# Altium PCB PV_PCB.PcbDoc (part 1 of 2)
Units mil, origin at the board's own origin, x right, y up, seen from the top; angles counter-clockwise.
Board outline 6100 x 4165 mil, 2 copper layers (Top Layer, Bottom Layer), stack 12.8 mil thick; 137 components, 94 nets, 414 pads, 55 vias.
Unrouted connection lines stored in the file: 34.
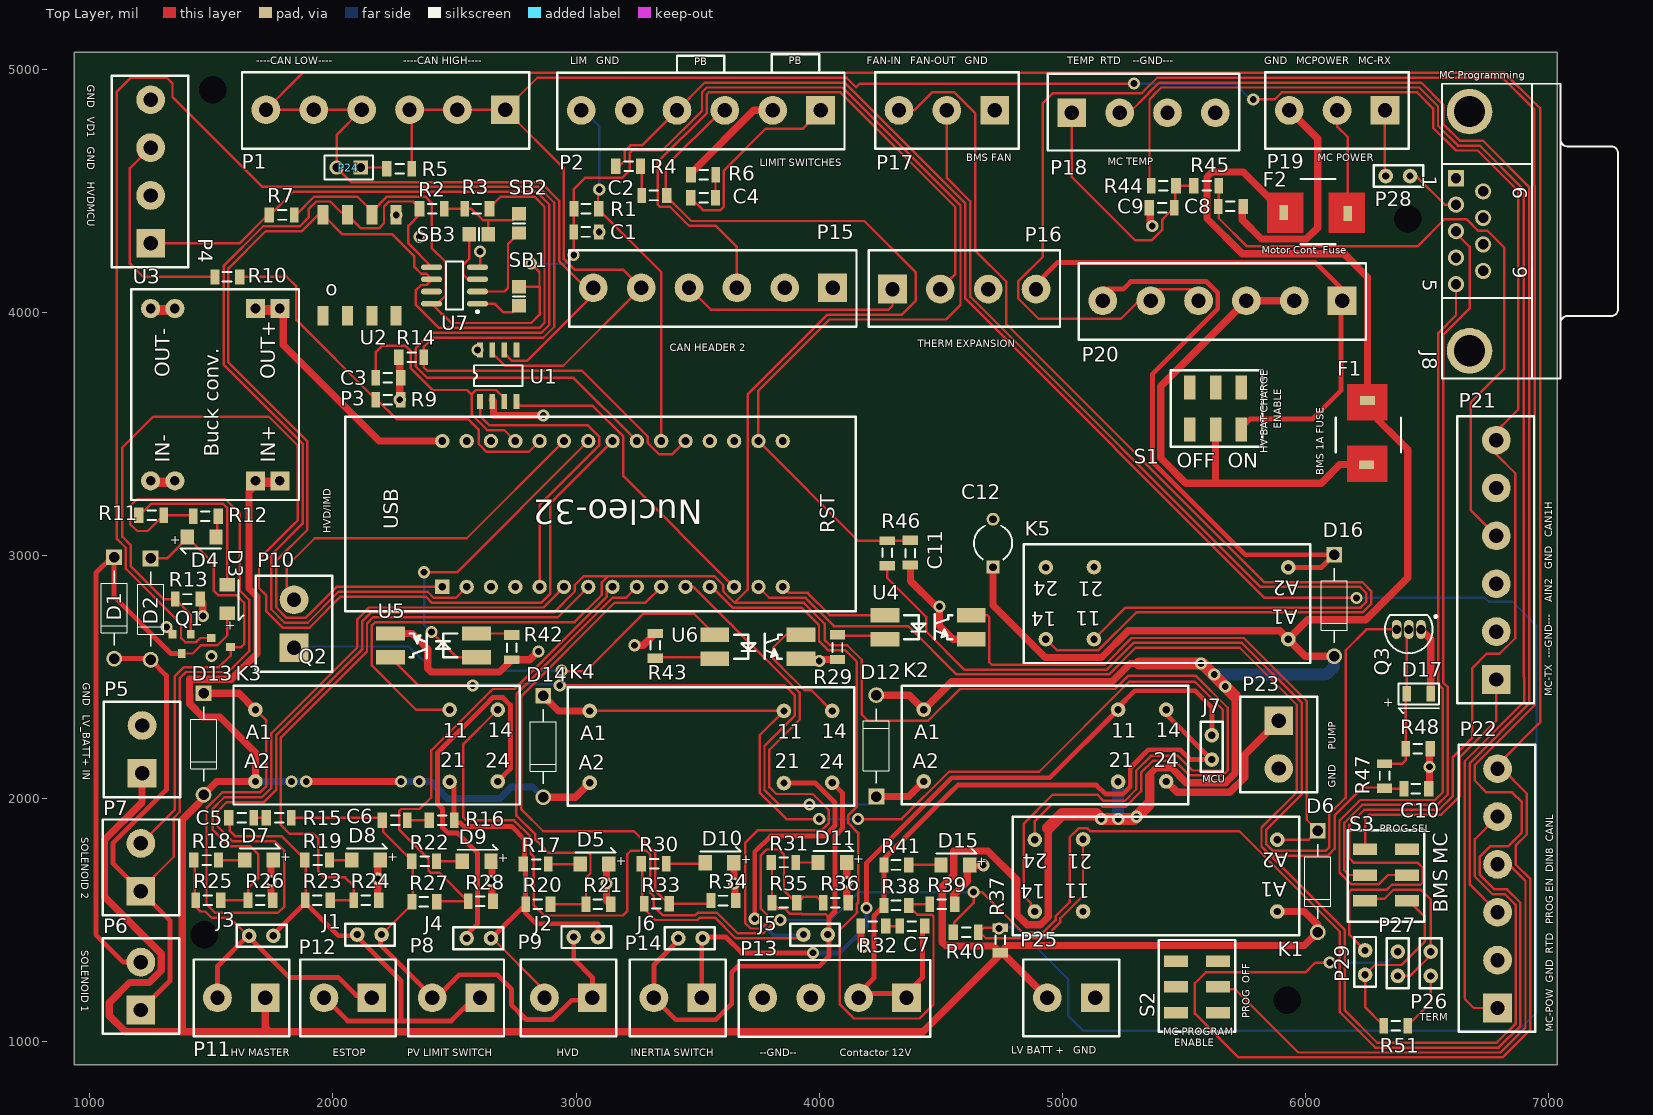
[diagram p0: Top Layer view]
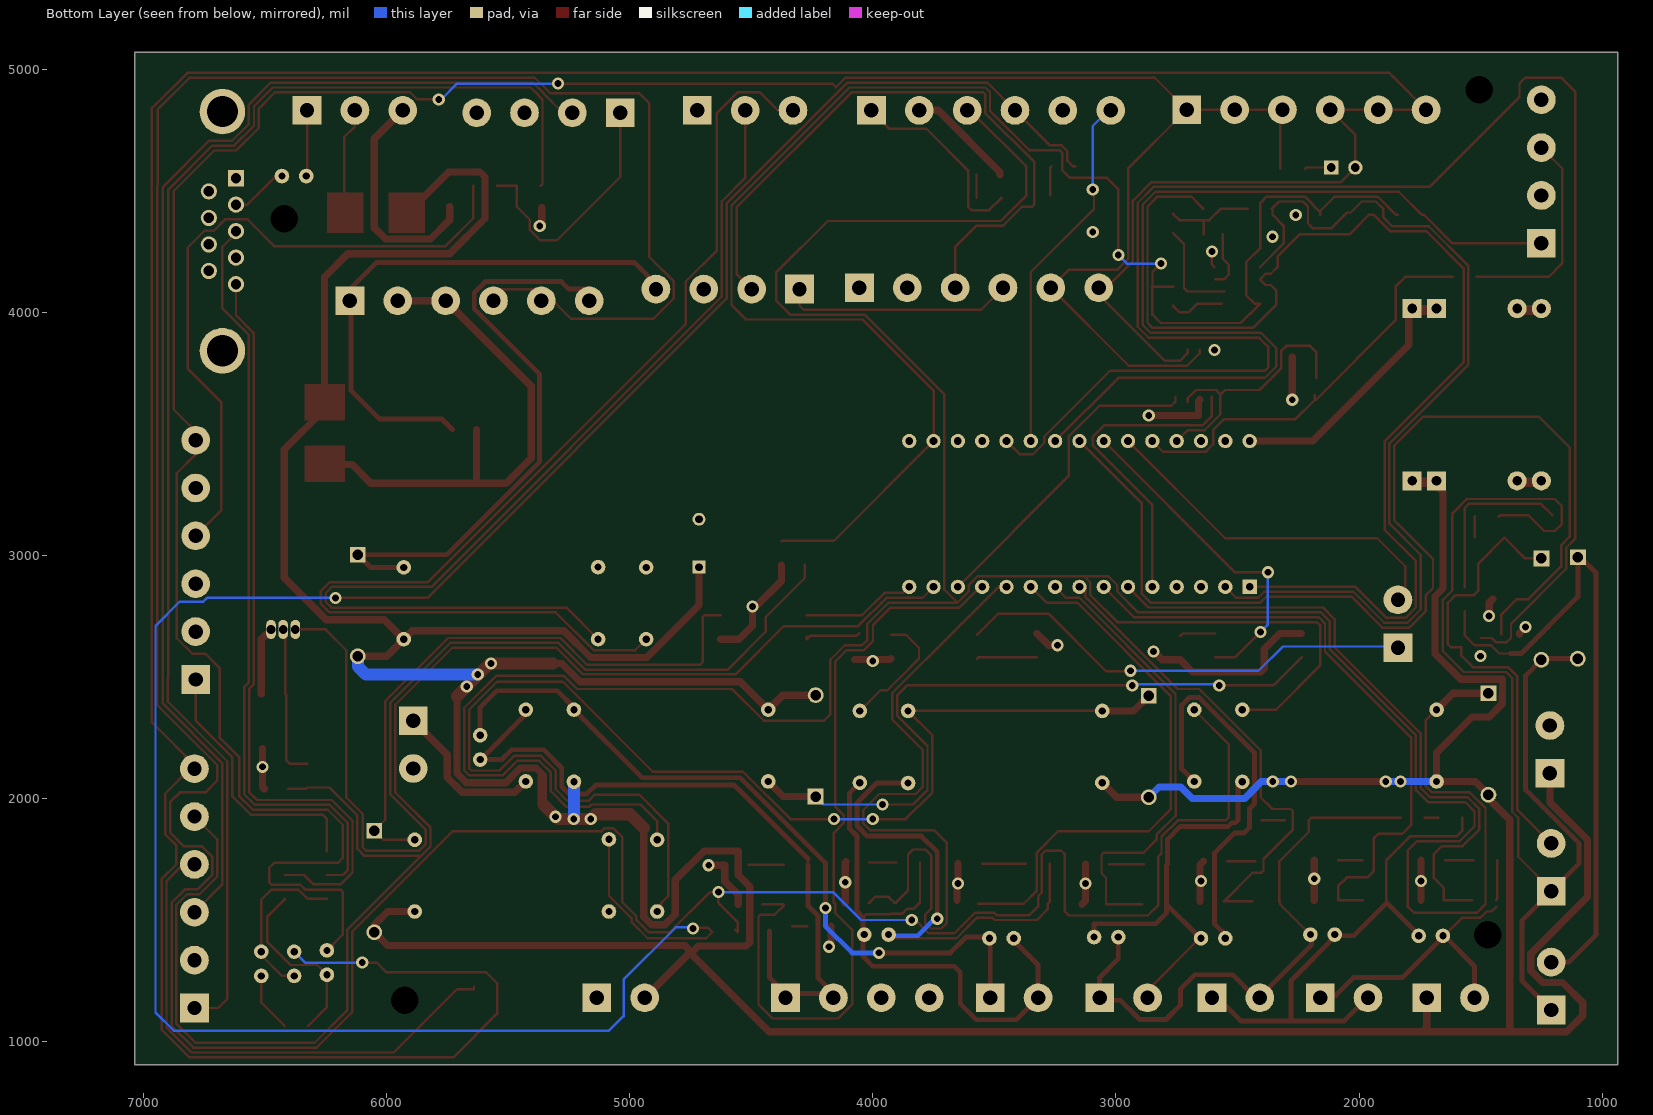
[diagram p1: Bottom Layer view, seen from below]
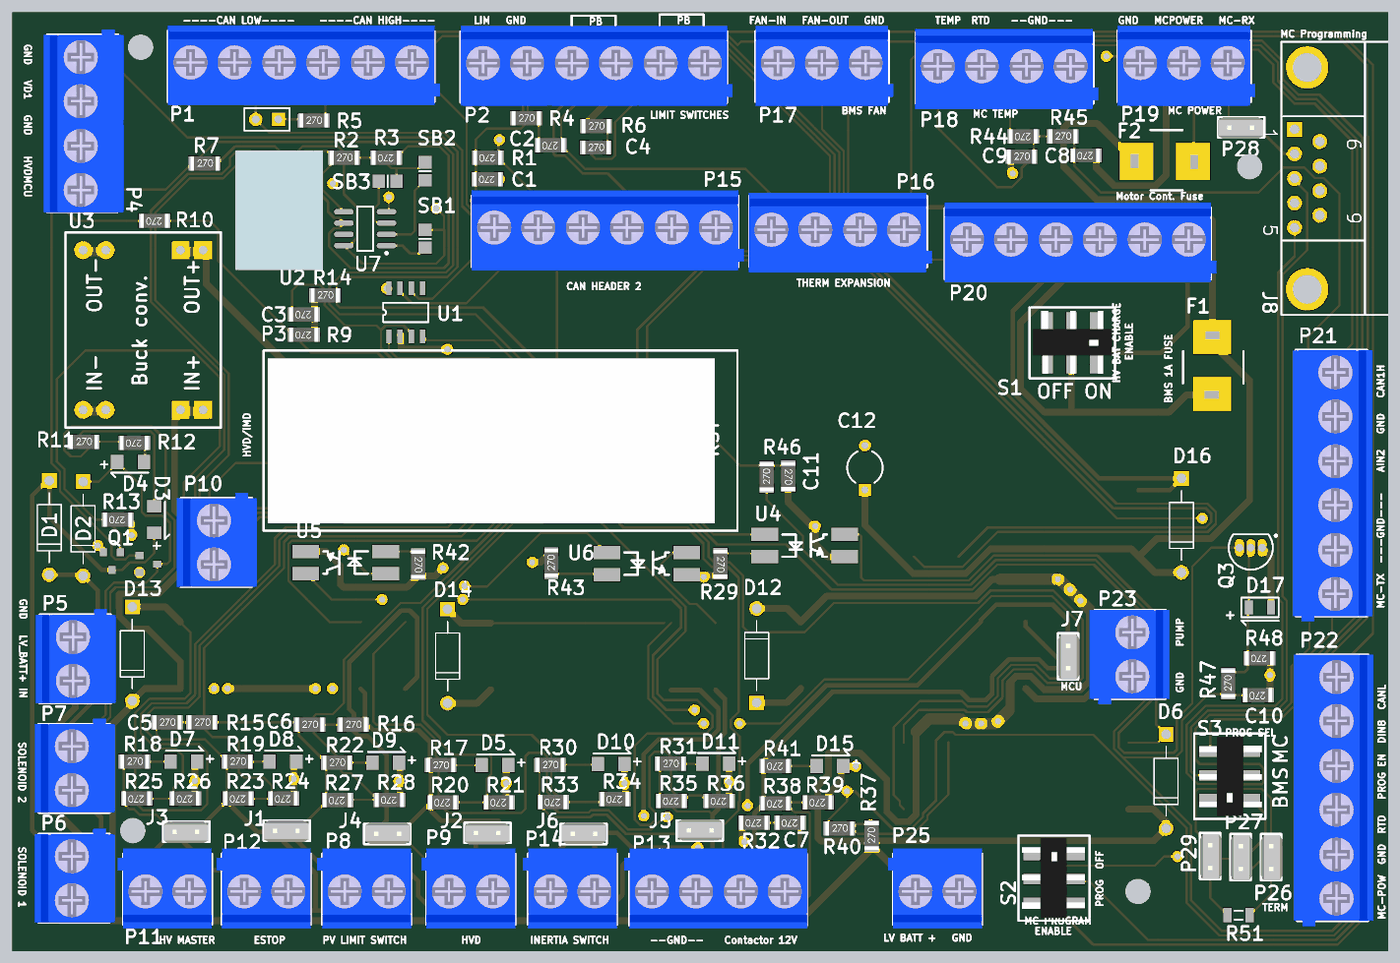
[diagram p3: 3D render of the assembled board from above, using the file's embedded part models]

## Layer stack, top to bottom
Top Solder: solder mask 0.4, Solder Resist, Dk 3.5
Top Layer: signal copper 1.4
Dielectric 1: core 10, FR-4, Dk 4.2
Bottom Layer: signal copper 1.4
Bottom Solder: solder mask 0.4, Solder Resist, Dk 3.5

## Board outline
935,905 7035,905 7035,5070 935,5070

## Design rules (kind name [scope] priority, off if disabled: settings)
Clearance [All] p1: gap=10 ignorepadtopadclearanceinfootprint=FALSE except(0: Arc-Hole Track-Hole SMDPad-Hole THPad-Hole Via-Hole Fill-Hole Poly-Hole Region-Hole Text-Hole)
PolygonConnect [All] p1: connectstyle=Relief reliefconductorwidth=10 reliefentries=4 polygonreliefangle="90 Angle" airgapwidth=10
RoomDefinition PV_MCU_IO [InComponentClass('PV_MCU_IO')] p1: confinementstyle=ConfineIn formatcopy=TRUE lockcomponents=FALSE outline 915,881.89 7050,881.89 7050,5040 915,5040
RoomDefinition PV_BMS_IO [InComponentClass('PV_BMS_IO')] p2: confinementstyle=ConfineIn formatcopy=TRUE lockcomponents=FALSE outline 930,995 7335,995 7335,5070 930,5070
RoomDefinition PV_Shutdown [InComponentClass('PV_Shutdown')] p3: confinementstyle=ConfineIn formatcopy=TRUE lockcomponents=FALSE outline 980,950 6455,950 6455,3160 980,3160
RoutingVias [All] p1: holewidth=28 width=50 viastyle="Through Hole" minholewidth=28 minwidth=50 maxholewidth=28 maxwidth=50
SolderMaskExpansion [All] p1: expansion=4
Width [All] p1: maxlimit=50 minlimit=10 preferedwidth=10 minimp=50.000000 maximp=50.000000 favimp=50.000000
30 further rules are at their usual default settings.

## Classes and differential pairs
component class PV_Shutdown: C5 C6 C7 D5 D6 D7 D8 D9 D10 D11 D12 D13 D14 D15 J1 J2 J3 J4 J5 J6 J7 K1 K2 K3 K4 P8 P9 P10 P11 P12 P13 P14 P23 R15 R16 R17 R18 R19 R20 R21 R22 R23 R24 R25 R26 R27 R28 R29 R30 R31 R32 R33 R34 R35 R36 R37 R38 R39 R40 R41 R42 R43 U4 U5 U6
component class PV_MCU_IO: C1 C2 C3 C4 C11 C12 D1 D2 D3 D4 P1 P2 P3 P4 P5 P6 P7 P24 P25 Q1 Q2 R1 R2 R3 R4 R5 R6 R7 R9 R10 R11 R12 R13 R14 SB1 SB2 SB3 U1 U2 U3
component class PV_BMS_IO: C8 C9 C10 D16 D17 F1 F2 J8 K5 P15 P16 P17 P18 P19 P20 P21 P22 P26 P27 P28 P29 Q3 R44 R45 R46 R47 R48 R51 S1 S2 S3

## Components (designator, comment, footprint, x,y, rotation, side; value= is the part's Value field where it differs from the comment)
C1 "Cap" 1206#1 3088.43,4330 r180 top value=100pF
C2 "Cap" 1206#1 3368.43,4480 r180 top value=100nF
C3 "Cap" 1206#1 2275,3730 r180 top value=1uF
C4 "Cap" 1206#1 3475,4470 r0 top value=100nF
C5 "Cap" 1206#1 1575,1920 r0 top value=100nF
C6 "Cap" 1206#1 2206.57,1910 r0 top value=100nF
C7 "Cap" 1206#1 4430,1475 r180 top value=100nF
C8 "Cap" 1206#1 5740,4435 r180 top value=1000pF
C9 "Cap" 1206#1 5361.57,4430 r0 top value=4700pF
C10 "Cap" 1206#1 6503.43,2040 r180 top value=100pF
C11 "Cap" 1206#1 4375,3058.43 r270 top value=100pF
C12 "Cap" CAPR5-4X5 4715,3050 r90 top value=220uF
D1 "Flyback" 1N4007 1097.13,2989.86 r270 top
D2 "Flyback" 1N4007 1247.13,2984.86 r270 top
D3 "LED1" "1206 LED" 1565,2820 r270 top
D4 "LED2" "1206 LED" 1460,3075 r180 top
D5 "LED1" "1206 LED" 3075.79,1730 r0 top
D6 "Diode" 1N4007 6047.13,1864.86 r270 top
D7 "LED1" "1206 LED" 1695.79,1746.57 r0 top
D8 "LED1" "1206 LED" 2135.79,1746.57 r0 top
D9 "LED1" "1206 LED" 2590.79,1741.57 r0 top
D10 "LED1" "1206 LED" 3590,1735 r0 top
D11 "LED1" "1206 LED" 4054.06,1736.57 r0 top
D12 "Diode" 1N4007 4237.87,2010.14 r90 top
D13 "Diode" 1N4007 1465,2430 r270 top
D14 "Diode" 1N4007 2862.13,2419.86 r270 top
D15 "LED1" "1206 LED" 4560,1726.57 r0 top
D16 "Diode" 1N4007 6115,3000 r270 top
D17 "Diode" "1206 DIODE" 6465.79,2430 r180 top
F1 "3A Fuse" "1A FUSE HOLDER" 6337.68,3302.24 r90 top
F2 "Fuse 3A" "1A FUSE HOLDER" 6244.65,4492.68 r180 top
J1 "S1011EC-02-ND" "2 Pin Jumper" 2100,1440 r0 top
J2 "S1011EC-02-ND" "2 Pin Jumper" 2990,1430 r0 top
J3 "S1011EC-02-ND" "2 Pin Jumper" 1655,1435 r0 top
J4 "S1011EC-02-ND" "2 Pin Jumper" 2650,1425 r180 top
J5 "S1011EC-02-ND" "2 Pin Jumper" 4035,1440 r180 top
J6 "S1011EC-02-ND" "2 Pin Jumper" 3520,1425 r180 top
J7 "S1011EC-02-ND" "2 Pin Jumper" 5615,2160 r90 top
J8 "D Connector 9" DSUB1.385-2H9 7049.02,4333.07 r270 top
K1 "RT444012F-ND" RT444012F 4883,-5255 r90 top
K2 "RT444012F-ND" RT444012F 5431,9155.28 r270 top
K3 "RT444012F-ND" RT444012F 2682,9155 r270 top
K4 "RT444012F-ND" RT444012F 4057,9150 r270 top
K5 "RT444012F-ND" RT444012F 4928,-4135 r90 top
P1 "CAN" "6POS TERM BLOCK" 2708.7,4832.52 r180 top
P2 "Header 6" "6POS TERM BLOCK" 4005.55,4830 r180 top
P3 "NUCLEO-L432KC" NUCLEO-32 2450,2870 r90 top
P4 "Header 4" "4POS TERM BLOCK" 1250,4283.15 r90 top
P5 "Battery Input" "2POS TERM BLOCK" 1215,2103.15 r90 top
P6 "Solenoid 8" "2POS TERM BLOCK" 1210,1130 r90 top
P7 "Solenoid 8" "2POS TERM BLOCK" 1210,1618.15 r90 top
P8 "PV Limit Switch" "2POS TERM BLOCK" 2605,1180 r180 top
P9 "HVD Interlock" "2POS TERM BLOCK" 3066.85,1180 r180 top
P10 "Battery Input" "2POS TERM BLOCK" 1840,2620 r90 top
P11 "HVMaster" "2POS TERM BLOCK" 1721.85,1180 r180 top
P12 "EStop1" "2POS TERM BLOCK" 2160,1180 r180 top
P13 "277-5738-ND" "4POS TERM BLOCK" 4358.7,1180.67 r180 top
P14 "Inertia Switch-NC" "2POS TERM BLOCK" 3516.85,1180 r180 top
P15 "Header 6" "6POS TERM BLOCK" 4055,4100.04 r180 top
P16 "Header 4" "4POS TERM BLOCK" 4301.3,4095 r0 top
P17 "Header 3" "3POS TERM BLOCK" 4721.85,4830 r180 top
P18 "Header 4" "4POS TERM BLOCK" 5038.78,4820 r0 top
P19 "Header 3" "3POS TERM BLOCK" 6326.85,4830 r180 top
P20 "Header 6" "6POS TERM BLOCK" 6150.55,4046.85 r180 top
P21 "Header 6" "6POS TERM BLOCK" 6785,2489.45 r90 top
P22 "Header 6" "6POS TERM BLOCK" 6790,1138.15 r90 top
P23 "Pump Power Switch" "2POS TERM BLOCK" 5890,2320 r270 top
P24 "TERM" HDR1X2 2115,4595 r180 top
P25 "Battery Input" "2POS TERM BLOCK" 5135,1180 r180 top
P26 "TERM" "2 Pin Jumper" 6515,1270 r90 top
P27 "TERM" "2 Pin Jumper" 6380,1270 r90 top
P28 "Program Enable" "2 Pin Jumper" 6330,4560 r0 top
P29 "Program Enable" "2 Pin Jumper" 6245,1275 r90 top
Q1 "MOSFET-N" SOT-23-3 1377.4,2596.26 r180 top
Q2 "MOSFET-N" SOT-23-3 1578.74,2622.6 r270 top
Q3 "2N3904" TO-92A 6425,2695 r90 top
R1 "Res1" 1206#1 3090,4425 r180 top value=1K
R2 "Res1" 1206#1 2360,4425 r0 top value=120
R3 "Res1" 1206#1 2640,4425 r180 top value=120
R4 "Res1" 1206#1 3166.57,4600 r0 top value=1K
R5 "Res1" 1206#1 2225,4590 r0 top value=120
R6 "Res1" 1206#1 3476.57,4565 r0 top value=1K
R7 "Res1" 1206#1 1741.57,4400 r0 top value=1K
R9 "Res1" 1206#1 2275,3640 r180 top value=2.2K
R10 "Res1" 1206#1 1613.43,4145 r180 top value=1K
R11 "Res1" 1206#1 1205,3165 r0 top value=1K
R12 "Res1" 1206#1 1523.43,3160 r180 top value=1K
R13 "Res1" 1206#1 1450,2820 r180 top value=10K
R14 "Res1" 1206#1 2275,3815 r0 top value=10K
R15 "Res1" 1206#1 1730,1920 r0 top value=1K
R16 "Res1" 1206#1 2400,1910 r0 top value=1K
R17 "Res1" 1206#1 2787.36,1730 r0 top value=1K
R18 "Res1" 1206#1 1430.79,1746.57 r0 top value=1K
R19 "Res1" 1206#1 1887.36,1746.57 r0 top value=1K
R20 "Res1" 1206#1 2890.79,1565 r180 top value=.3793K
R21 "Res1" 1206#1 3139.21,1565 r180 top value=1K
R22 "Res1" 1206#1 2327.36,1741.57 r0 top value=1K
R23 "Res1" 1206#1 1984.21,1581.57 r180 top value=.3793K
R24 "Res1" 1206#1 2184.21,1581.57 r180 top value=1K
R25 "Res1" 1206#1 1534.21,1581.57 r180 top value=.3793K
R26 "Res1" 1206#1 1749.21,1581.57 r180 top value=1K
R27 "Res1" 1206#1 2423.43,1575 r180 top value=.3793K
R28 "Res1" 1206#1 2654.21,1576.57 r180 top value=1K
R29 "Res1" 1206#1 4075,2670 r270 top value="180 Ohm"
R30 "Res1" 1206#1 3272.36,1731.57 r0 top value=1K
R31 "Res1" 1206#1 3805.79,1736.57 r0 top value=1K
R32 "Res1" 1206#1 4270,1475 r180 top value=2K
R33 "Res1" 1206#1 3379.21,1566.57 r180 top value=.3793K
R34 "Res1" 1206#1 3653.42,1580 r180 top value=1K
R35 "Res1" 1206#1 3904.21,1571.57 r180 top value=.3793K
R36 "Res1" 1206#1 4115,1571.57 r180 top value=1K
R37 "Res1" 1206#1 4745,1370 r90 top value=1K
R38 "Res1" 1206#1 4365,1560 r180 top value=.3793K
R39 "Res1" 1206#1 4553.43,1565 r180 top value=1K
R40 "Res1" 1206#1 4555,1450 r0 top value=0
R41 "Res1" 1206#1 4365,1726.57 r180 top value=1K
R42 "Res1" 1206#1 2735,2668.43 r270 top value="180 Ohm"
R43 "Res1" 1206#1 3325,2580 r90 top value="48.7 Ohm"
R44 "Res1" 1206#1 5463.43,4520 r180 top value=300K
R45 "Res1" 1206#1 5545,4520 r0 top value=41.2K
R46 "Res1" 1206#1 4280,2961.57 r90 top value=10K
R47 "RES1" 1206#1 6325,2045 r90 top value=10.0K
R48 "Res1" 1206#1 6510,2205 r180 top value=4.7K
R51 "Res1" 1206#2 6420,1065 r180 top value=120
S1 "JS202011SCON" JS202011SCON 5728.43,3516.77 r180 top
S2 "JS202011SCON" JS202011SCON 5640,1323.43 r270 top
S3 "JS202011SCON" JS202011SCON 6245,1586.57 r90 top
SB1 "Res1" 6-0805_M 2765,4065 r90 top value=0
SB2 "Res1" 6-0805_M 2765,4365 r90 top value=0
SB3 "Res1" 6-0805_M 2600,4320 r0 top value=0
U1 "MCP2561" 8-SOIC 2605,3632.4 r90 top
U2 "SSCMNNN030PA2A3" 8-SMT 2260,3985 r180 top
U3 "MP1584EN Breakout Board" "MP1584EN Breakout" 1250,3306.34 r90 top
U4 "TPC817" 4-SOP 4270.67,2753.43 r0 top
U5 "TPC817" 4-SOP 2590.79,2580 r180 top
U6 "TPC817" 4-SOP 3570.67,2673.43 r0 top
U7 "CAT24C32" SO8_N 2500,4110 r180 top

## Footprints (in the part's own frame and the unit in brackets; to place one, negate y for a bottom-side part, rotate by r counter-clockwise, add the part's x,y. Pads: shape width x height; smd on the part's side, far side on the other; paste and mask are expansions set on the pad)
"1A FUSE HOLDER" [mm] "0154001.DR"
  rect 0.9x1.6 smd: 1(1.8,2.2) 2(8.5,2.1)
  Top Layer region: 0,0 3.81,0 3.81,4.24 0,4.24
  Top Layer region: 6.4,0 10.21,0 10.21,4.24 6.4,4.24
  silkscreen extent 3.1,-1.4 6.7,5.4
1N4007 [mm] "DIODE"
  rect 1.65x1.65 hole 1.1: 1(-0.063,0.073)
  round 1.65 hole 1.1: 2(10.537,0.073)
  silkscreen extent 1.34,-1.28 9.14,1.42
"2 Pin Jumper" [mil]
  round 60 hole 30: 1(0,0) 2(100,0)
  silkscreen extent -50,-45 155,45, body extent -50,-51 150,45, height 344
"2POS TERM BLOCK" [mm] "5mm Pitch"
  rect 3x3 hole 1.5: 1(0,0)
  round 3 hole 1.5: 2(5,0)
  silkscreen extent -2.5,-4 7.5,4, body extent -2.51,-4.57 8.09,4.43, height 12.6
"3POS TERM BLOCK" [mm] "5mm Pitch"
  rect 3x3 hole 1.5: 1(0,0)
  round 3 hole 1.5: 2(5,0) 3(10,0)
  silkscreen extent -2.5,-4 12.5,4, body extent -3.03,-4.56 12.49,4.44, height 12.6
4-SOP [mm] "TPC817"
  rect 3x1.5 smd: 1(0,0) 2(0,-2.5) 3(9,0) 4(9,-2.5)
  silkscreen extent 2,-2.5 7,0.1, body extent -0.7,-3.7 9.6,1, height 2
"4POS TERM BLOCK" [mm]
  rect 3x3 hole 1.5: 1(0,0)
  round 3 hole 1.5: 2(5,0) 3(10,0) 4(15,0)
  silkscreen extent -2.5,-3.94 17.5,4.06, body extent -2.55,-4.55 18.05,4.45, height 3.8
6-0805_M [mm] "Chip Resistor, Body 2.0x1.2mm, IPC Low Density"
  rect 1.4x1.5 smd: 1(-1,0) 2(1,0)
  silkscreen extent 0,-0.65 0,0.65, body extent -1.07,-0.7 1.07,0.7, height 0.7
"6POS TERM BLOCK" [mm] "5mm"
  rect 3x3 hole 1.5: 1(0,0)
  round 3 hole 1.5: 2(5,0) 3(10,0) 4(15,0) 5(20,0) 6(25,0)
  silkscreen extent -2.5,-3.94 27.5,4.06, body extent -3.11,-4.55 27.49,4.45, height 12.87
8-SMT [mm]
  rect 1.15x2.04 smd: 1(0,-10.54) 2(2.54,-10.54) 3(5.08,-10.54) 4(7.62,-10.54) 5(7.62,0) 6(5.08,0) 7(2.54,0) 8(0,0)
  body extent -1.35,-12 8.55,1.46, height 5.44
8-SOIC [mm]
  rect 1.55x0.6 smd: 1(0,0) 2(0,-1.27) 3(0,-2.54) 4(0,-3.81) 5(5.4,-3.81) 6(5.4,-2.54) 7(5.4,-1.27) 8(5.4,0)
  silkscreen extent 1.61,-4.44 3.79,0.64
1206#1 [mm] "1206 SMD Resistor"
  rect 1x1.6 smd: 1(-0.1,0)
  rect 0.9x1.6 smd: 2(2.5,0)
  silkscreen extent 0.8,-0.5 1.7,0.5, body extent -0.4,-0.8 2.8,0.8, height 0.7
1206#2 [mm] "1206 SMD Resistor"
  rect 0.9x1.6 smd: 1(0,0) 2(2.5,0)
  silkscreen extent 0.8,-0.5 1.7,0.5
"1206 DIODE" [mm]
  rect 0.9x1.6 smd: 1(-1.25,0) 2(1.25,0)
  silkscreen extent -2.1,-1.1 2.1,2, body extent -1.4,-0.8 1.5,0.8, height 1
"1206 LED" [mm]
  rect 1.4x1.6 smd: 1(-1.5,0) 2(1.5,0)
  silkscreen extent -2,1.2 2.2,1.7, body extent -1.4,-0.8 1.5,0.8, height 1
CAPR5-4X5 [mm] "Capacitor; 2 Leads"
  rect 1.35x1.35 hole 0.8: 1(-2.5,0)
  round 1.35 hole 0.8: 2(2.5,0)
  silkscreen extent -1.69,-2 1.82,2
DSUB1.385-2H9 [mm] "Connector; D Subminiature; 9 Position; Right Angle; Pitch 1.385 mm"
  rect 1.69x1.69 hole 1.09: 1(-5.54,-10.92)
  round 1.69 hole 1.09: 2(-2.77,-10.92) 3(0,-10.92) 4(2.77,-10.92) 5(5.54,-10.92) 6(-4.155,-8.08) 7(-1.385,-8.08) 8(1.385,-8.08) 9(4.155,-8.08)
  round 4.76 hole 3.26: 10(-12.495,-9.5) 11(12.495,-9.5)
  silkscreen extent -15.4,-12.4 15.4,6
HDR1X2 [mm] "Connector; Header; 2 Position"
  rect 1.5x1.5 hole 0.9: 1(0,0)
  round 1.5 hole 0.9: 2(2.54,0)
  silkscreen extent -1.27,-1.27 3.81,1.27
JS202011SCON [mm]
  rect 1.2x2.5 smd: 1(-0.2,-4.4) 2(2.5,-4.4) 3(5.2,-4.4) 4(5.2,0) 5(2.5,0) 6(-0.2,0)
  silkscreen extent -2.4,-6.2 7.2,1.8, body extent -2.1,-5.8 6.9,1.26, height 4.27
"MP1584EN Breakout" [mm] "Buck Converter"
  round 2 hole 1: 0(0,0) 0(0,-2.54) 2(18,-2.54) 2(18,0)
  rect 2x2 hole 1: 1(0,-10.96) 1(0,-13.5) 3(18,-13.5) 3(18,-10.96)
  silkscreen extent -2,-15.5 20,2
NUCLEO-32 [mm]
  rect 1.5x1.5 hole 0.8: 1(0,0)
  round 1.5 hole 0.8: 2(0,-2.54) 3(0,-5.08) 4(0,-7.62) 5(0,-10.16) 6(0,-12.7) 7(0,-15.24) 8(0,-17.78) 9(0,-20.32) 10(0,-22.86) 11(0,-25.4) 12(0,-27.94) 13(0,-30.48) 14(0,-33.02) 15(0,-35.56) 16(15.24,-35.56) 17(15.24,-33.02) 18(15.24,-30.48) 19(15.24,-27.94) 20(15.24,-25.4) 21(15.24,-22.86) 22(15.24,-20.32) 23(15.24,-17.78) 24(15.24,-15.24) 25(15.24,-12.7) 26(15.24,-10.16) 27(15.24,-7.62) 28(15.24,-5.08) 29(15.24,-2.54) 30(15.24,0)
  silkscreen extent -2.54,-43.18 17.78,10.16, body extent -1.67,-40.6 16.87,9.69, height 5
RT444012F [mil] "RELAY GEN PURPOSE DPST 8A 12V"
  round 60 hole 30: 1(6790,-1001) 2(7085.28,-1001) 3(6790,-202) 4(6790,-4.02) 5(7086.61,-202.01) 6(7085.28,-4)
  silkscreen extent 6692,-1091 7180,87, body extent 6705,-1075 7169,75, height 394
SO8_N [mm] "SOIC, 8-Leads, Body 4.9x3.9mm, Pitch 1.27mm, IPC Medium Density"
  oval 2.2x0.6 smd: 1(-2.4,1.905) 2(-2.4,0.635) 3(-2.4,-0.635) 4(-2.4,-1.905) 5(2.4,-1.905) 6(2.4,-0.635) 7(2.4,0.635) 8(2.4,1.905)
  silkscreen extent -2.53,-2.5 0.9,2.88, body extent -2,-2.5 2,2.5, height 1.75
SOT-23-3 [mm] "MOSFET"
  rect 0.8x0.9 smd: D(0,0) G(-0.95,-2) S(0.95,-2)
TO-92A [mm] "TO, Flat Index; 3 In-Line, Axial Leads; Body Dia. 4.5mm; Leads 0.51 x 0.48 mm (max)"
  oval 2x1 hole 0.9: 1(0,-1.27) 2(0,0) 3(0,1.27)
  silkscreen extent -2.48,-2.96 1.5,2.48, body extent -2.48,-2.5 1.5,2.5, height 6.86

## Part data
C1 C2 C3 C4 C5 C6 C7 C8 C9 C10 C11 C12: "Capacitor", LatestRevisionDate=17-Jul-2002, LatestRevisionNote="Re-released for DXP Platform.", PackageDescription="Radial Cap, Thru-Hole; 2 Leads; 0.3 in Pin Spacing", PackageReference=RAD-0.3, Published=8-Jun-2000, Publisher="Altium Limited"
D1 D2: library part Diode, "Default Diode", Code_JEDEC=DO-214-AB, LatestRevisionDate=17-Jul-2002, LatestRevisionNote="Re-released for DXP Platform.", PackageDescription="DO-214-AB/SMC; 2 C-Bend Leads; Body 7.9 x 5.9 mm, inc. leads (LxW)", PackageReference=SMC, PackageVersion=Sep-1996, Published=8-Jun-2000, Publisher="Altium Limited"
D3: library part LED2, "Typical RED, GREEN, YELLOW, AMBER GaAs LED", LatestRevisionDate=17-Jul-2002, LatestRevisionNote="Re-released for DXP Platform.", PackageDescription="SM LED; 2 Flat Leads", PackageReference=3.2X1.6X1.1, PackageVersion=Feb-2002, Published=8-Jun-2000, Publisher="Altium Limited"
D4: "Typical RED, GREEN, YELLOW, AMBER GaAs LED", LatestRevisionDate=17-Jul-2002, LatestRevisionNote="Re-released for DXP Platform.", PackageDescription="SM LED; 2 Flat Leads", PackageReference=3.2X1.6X1.1, PackageVersion=Feb-2002, Published=8-Jun-2000, Publisher="Altium Limited"
D5 D7 D8 D9 D10 D11 D15: "Typical RED GaAs LED", LatestRevisionDate=08-Jul-2005, LatestRevisionNote="Mech Layer 1 removed.", PackageDescription="LED; 2 Leads", PackageReference=LED-1, Published=8-Jun-2000, Publisher="Altium Limited"
D6 D12 D13 D14 D16 D17: "Default Diode", Code_JEDEC=DO-214-AB, LatestRevisionDate=17-Jul-2002, LatestRevisionNote="Re-released for DXP Platform.", PackageDescription="DO-214-AB/SMC; 2 C-Bend Leads; Body 7.9 x 5.9 mm, inc. leads (LxW)", PackageReference=SMC, PackageVersion=Sep-1996, Published=8-Jun-2000, Publisher="Altium Limited"
F1 F2: library part "Fuse 1", "Fuse", LatestRevisionDate=17-Jul-2002, LatestRevisionNote="Re-released for DXP Platform.", PackageDescription="Thru-Hole; 2 Leads", PackageReference=PIN-W2/E2.8, Published=8-Jun-2000, Publisher="Altium Limited"
  F1: ComponentLink1Description=Digikey, ComponentLink1URL=F1226CT-ND
  F2: ComponentLink1Description="Digikey- FUSE", ComponentLink1URL=https://www.digikey.com/product-detail/en/littelfuse-inc/0451001.MRL/F2577CT-ND/813055, ComponentLink2Description="Digikey - Holder", ComponentLink2URL=https://www.digikey.com/product-detail/en/littelfuse-inc/0154001.DR/F1222TR-ND/183352
J1 J2 J3 J4 J5 J6 J7: "CONN HEADER .100\" SNGL STR 2POS", ComponentLink1Description="Male- Digikey", ComponentLink1URL=https://www.digikey.com/product-detail/en/sullins-connector-solutions/PRPC002SAAN-RC/S1011EC-02-ND/2775252, ComponentLink2Description="Female - Digikey", ComponentLink2URL=https://www.digikey.com/products/en?keywords=S9001-ND
J8: "Receptacle Assembly, 9 Position, Right Angle", PackageDocument=O, DatasheetDocument=1-Sep-1999, Gender=Receptacle, LatestRevisionDate=17-Jul-2002, LatestRevisionNote="Re-released for DXP Platform.", Orientation="Right Angle", PackageReference=788750, Positions=9, Published=15-Jun-2001, Publisher="Altium Limited"
K1 K2 K3 K4 K5: "RELAY GEN PURPOSE DPST 8A 12V", ComponentLink1Description=Digikey, ComponentLink1URL=https://www.digikey.com/product-detail/en/te-connectivity-potter-brumfield-relays/RT444012F/RT444012F-ND/1427665
P1: library part "Header 6", "Header, 6-Pin", LatestRevisionDate=17-Jul-2002, LatestRevisionNote="Re-released for DXP Platform.", Publisher="Altium Limited"
P2 P15 P20 P21 P22: "Header, 6-Pin", LatestRevisionDate=17-Jul-2002, LatestRevisionNote="Re-released for DXP Platform.", Publisher="Altium Limited"
P3: "STM32L432KC Development Board", ComponentLink1Description=MBED, ComponentLink1URL=https://os.mbed.com/platforms/ST-Nucleo-L432KC/, ComponentLink2Description=Digikey, ComponentLink2URL=https://www.digikey.com/products/en?keywords=NUCLEO-L432KC
P4 P16 P18: "Header, 4-Pin", LatestRevisionDate=17-Jul-2002, LatestRevisionNote="Re-released for DXP Platform.", Publisher="Altium Limited"
P5 P6 P7 P10 P24 P25 P26 P27 P28 P29: library part "Header 2", "Header, 2-Pin", LatestRevisionDate=17-Jul-2002, LatestRevisionNote="Re-released for DXP Platform.", Publisher="Altium Limited"
P8 P9 P11 P12 P14 P23: library part "Header 2", "277-5733-ND", LatestRevisionDate=17-Jul-2002, LatestRevisionNote="Re-released for DXP Platform.", Publisher="Altium Limited"
  P14 P23: ComponentLink1Description="Electric Motor Sport", ComponentLink1URL=http://www.electricmotorsport.com/resettable-inertia-switch-crash-sensor-kit.html
P13: library part "Header 4", "Header, 4-Pin", LatestRevisionDate=17-Jul-2002, LatestRevisionNote="Re-released for DXP Platform.", Publisher="Altium Limited"
P17 P19: "Header, 3-Pin", LatestRevisionDate=17-Jul-2002, LatestRevisionNote="Re-released for DXP Platform.", Publisher="Altium Limited"
Q1 Q2: "N-Channel MOSFET", LatestRevisionDate=17-Jul-2002, LatestRevisionNote="Re-released for DXP Platform.", PackageDescription="TO, Flat Index; 3 In-Line, Axial Leads; Body Dia. 4.6mm; Lead Dia. 0.5 mm (max)", PackageReference=E3, PackageVersion=1995/1996, Published=8-Jun-2000, Publisher="Altium Limited"
Q3: "NPN General Purpose Amplifier", ComponentLink1Description="Manufacturer Link", ComponentLink1URL=http://www.fairchildsemi.com/, ComponentLink2Description=Datasheet, ComponentLink2URL=http://www.fairchildsemi.com/ds/2N%2F2N3904.pdf, DatasheetVersion=1997, LatestRevisionDate=15-Jan-2003, LatestRevisionNote="PCB Footprint 'BCY-W3/D4.7' replaced", PackageDescription="TO, Flat Index; 3 In-Line, Axial Leads; Body Dia. 4.5mm; Leads 0.51 x 0.48 mm (max)", PackageReference=TO-92A, PackageVersion=Sep-1998, Published=8-Jun-2000, Publisher="Altium Limited"
R1 R2 R3 R4 R5 R6 R7 R9 R10 R11 R12 R13 R14 R15 R16 R17 R18 R19 R20 R21 R22 R23 R24 R25 R26 R27 R28 R29 R30 R31 R32 R33 R34 R35 R36 R37 R38 R39 R40 R41 R42 R43 R44 R45 R46 R48 R51 SB1 SB2 SB3: "Resistor", LatestRevisionDate=17-Jul-2002, LatestRevisionNote="Re-released for DXP Platform.", PackageDescription="Axial Device, Thru-Hole; 2 Leads; 0.3 in Pin Spacing", PackageReference=AXIAL-0.3, Published=8-Jun-2000, Publisher="Altium Limited"
R47: library part Res1, "Resistor", LatestRevisionDate=17-Jul-2002, LatestRevisionNote="Re-released for DXP Platform.", PackageDescription="Axial Device, Thru-Hole; 2 Leads; 0.3 in Pin Spacing", PackageReference=AXIAL-0.3, Published=8-Jun-2000, Publisher="Altium Limited"
S1 S2 S3: "DPST Switch", ComponentLink1Description=Digikey, ComponentLink1URL=https://www.digikey.com/product-detail/en/c-k/JS202011SCQN/401-2002-1-ND/1640098
U1: "CAN Transciever", ComponentLink1Description=Part, ComponentLink1URL=https://www.digikey.com/product-detail/en/microchip-technology/MCP2561-E-SN/MCP2561-E-SN-ND/4079961, ComponentLink2Description=Datasheet, ComponentLink2URL=http://ww1.microchip.com/downloads/en/DeviceDoc/20005167C.pdf
U2: "Honeywell Digital Pressure Sensor", ComponentLink1Description=Part, ComponentLink1URL=https://www.digikey.com/product-detail/en/honeywell-sensing-and-productivity-solutions/SSCMNNN030PA2A3/480-6407-ND/2416123, ComponentLink2Description=Datasheet, ComponentLink2URL=https://sensing.honeywell.com/index.php?ci_id=151134
U3: "Buck Converter", ComponentLink1Description=Part, ComponentLink1URL=https://www.amazon.com/eBoot-MP1584EN-Converter-Adjustable-Module/dp/B01MQGMOKI/
U4 U5 U6: "Opto-Coupler", ComponentLink1Description=Digi-Key, ComponentLink1URL=https://www.digikey.com/product-detail/en/taiwan-semiconductor-corporation/TPC817S1D-RAG/TPC817S1D-RAGCT-ND/7359685, ComponentLink2Description=Datasheet, ComponentLink2URL=http://www.taiwansemi.com/products/datasheet/TPC817%20SERIES_C1612.pdf
U7: "I2C EEPROM", ComponentLink1Description=Part, ComponentLink1URL=https://www.digikey.com/product-detail/en/on-semiconductor/CAT24C32WI-GT3/CAT24C32WI-GT3CT-ND/1631159, ComponentLink2Description=Datasheet, ComponentLink2URL=http://www.onsemi.com/pub/Collateral/CAT24C32-D.PDF

## Free pads (board coordinates)
  round 60 hole 113 unplated: 2(1470,1440) 2(1505,4915) 2(5925,1170) 2(6420,4385)

## Via types
v1: diameter 50, hole 28, Top Layer to Bottom Layer, 55 vias

## Nets (pads, with @x,y where several pads share a name; then routed paths per layer and width w, separated by ;. In a path a pad name is that pad's centre, name@x,y a point inside that pad or via, vN(x,y) a via of type N, cw(c..) or ccw(c..) an arc to the next point about the centre after c; other vN are vias at no path point)
24V+: D1.2 D2.2 P6.1 P7.1 R11.2 R12.2 | length 4573.6
  Top Layer w10: P7.1@1210,1618.15 1210,1625 1345,1760 1345,1920 1370,1945 1370,2495 1394.94,2519.94 1569.43,2519.94 1655,2605.52 1655,2817.42 1615.94,2856.47 1615.94,3172.34 1556.78,3231.5 1195.16,3231.5 1166.38,3202.71 1166.38,3127.29 1175.16,3118.5 1176.5,3118.5 1195,3100 1238.43,3100 R11.2@1303.43,3165 1420,3165 R12.2@1425,3160 ; D2.2@1245,2575 D2.2@1250,2570
  Top Layer w20: D1.2@1100,2575 D2.2@1245,2575 ; P6.1@1210,1130 1329.06,1249.06 1329.06,1499.09 1210,1618.15 1095,1733.15 1095,1815 1315,2035 1315,2505 D2.2@1250,2570
AIN2: C8.2 P21.4 R45.2 | length 2735.9
  Top Layer w10: R45.2@5643.43,4520 5643.43,4386.57 5759.25,4270.75 6460.24,4270.75 6570.83,4381.34 6663.66,4381.34 6710,4335 6748.19,4335 6818.19,4265 6818.19,3768.19 6680,3630 6680,3185 P21.4@6785,3080
BMS_STAT_FDBK: P3.10 R33.1 R34.2 | length 2271
  Top Layer w10: P3.10@3350,2870 3285.47,2805.47 3158.77,2805.47 2775,2421.7 2775,1955 2865,1865 3237.65,1865 3325.08,1777.57 3325.08,1621 3379.21,1566.86 3379.21,1566.57 R34.2@3565.79,1566.57
CAN1_H: P1.1 P1.2 P1.3 P15.5 P21.6 P29.2 R5.2 U1.7 | length 11327.4
  Top Layer w10: R5.2@2323.43,4590 2323.43,4824.09 P1.3@2315,4832.52 P1.1@2708.7,4832.52 ; U1.7@2655,3845 2655,3831.46 2706.98,3779.49 2947.05,3779.49 P15.5@3267.6,4100.04 3192.64,4175 2993.43,4175 2950,4218.43 2950,4591.22 P1.1@2708.7,4832.52 ; v1(5295,4940) 4166.57,4940 4151.57,4925 4112.51,4964.06 2840.24,4964.06 P1.1@2708.7,4832.52 ; v1(5785,4875) 5873.42,4875 5902.48,4904.06 6459.38,4904.06 6525,4838.43 6525,4758.43 6618.43,4665 6708.43,4665 6875,4498.43 6875,3600 6748.7,3473.7 P21.6@6785,3473.7 6785,3415 6862.5,3337.5 6862.5,2659.07 6798.43,2595 6745,2595 6685,2535 6685,2248.28 6605,2168.28 6605,2008.67 6549.83,1953.5 6241.78,1953.5 6180,1891.72 6180,1754.38 6199.38,1735 6462.28,1735 6482.44,1714.84 6482.44,1655.16 6472.47,1645.2 6354.52,1645.2 6334.52,1625.2 6189.57,1625.2 6180.79,1616.41 6180.79,1439.21 P29.2@6245,1375
  Bottom Layer w10: P1.1@2708.7,4832.52 P1.1@2708.7,4838.7 ; v1(5295,4940) 5710,4940 5775,4875 v1(5785,4875)
CAN1_L: P1.4 P1.5 P1.6 P15.6 P22.6 P24.2 P27.2 U1.6 | length 14470.2
  Top Layer w10: U1.6@2705,3845 2705,3831.46 2736.98,3799.49 2797.77,3799.49 3065,4066.72 3065,4094.29 P15.6@3070.75,4100.04 3040.11,4100.04 2930,4210.15 2930,4458.28 2853.17,4535.12 2074.88,4535.12 P24.2@2015,4595 2015,4729.37 2118.15,4832.52 P1.6@1724.45,4832.52 1858.5,4966.57 1875.99,4984.06 6819.23,4984.06 6948.28,4855 6966.19,4837.09 6966.19,2314.63 6936.57,2285 6808.03,2156.46 6790,2156.46 P22.6@6790,2122.4 6807.6,2122.4 6910,2020 6910,1852.23 6864.06,1806.28 6864.06,1729.23 6925,1668.28 6925,1048.97 6811.03,935 5725,935 5545,1115 5545,1240 5589.8,1284.8 5999.8,1284.8 6040,1325 v1(6100,1325)
  Bottom Layer w10: v1(6100,1325) 6335,1325 P27.2@6380,1370
CAN1_RX: P3.13 U1.4 | length 1326.3
  Top Layer w10: U1.4@2755,3652.4 U1.4@2755,3632.4 2772.4,3615 3067.97,3615 3194.53,3488.44 3194.53,3325.47 P3.13@3650,2870
CAN1_TX: P3.5 U1.1 | length 1323.4
  Top Layer w10: U1.1@2605,3652.4 U1.1@2605,3632.4 2605,3573.43 2643.9,3534.53 3048.44,3534.53 3094.53,3488.44 3094.53,3451.56 2850,3207.03 P3.5@2850,2870
CANTHERM_H: P15.3 P16.2 | length 2692.3
  Top Layer w10: P15.3@3661.3,4100.04 3661.3,4268.7 3575,4355 3465.14,4355 3386.64,4433.5 3344.5,4433.5 3335,4443 3335,4616.99 3537.79,4819.78 3537.79,4896.23 3545.62,4904.06 4087.66,4904.06 4560,4431.72 4560,4156.85 4498.15,4095 P16.2@4493.66,4095
CANTHERM_L: P15.4 P16.1 | length 978.3
  Top Layer w10: P15.4@3464.45,4100.04 3554.49,4010 4285,4010 4301.3,4026.3 P16.1@4301.3,4095 P16.1@4301.3,4123.7
Charge_Power: P16.4 P20.1 S1.6 | length 2265.2
  Top Layer w10: P16.4@4891.85,4095 P16.4@4891.85,4116.85
  Top Layer w20: P16.4@4891.85,4116.85 4979.06,4204.06 6041.5,4204.06 6150.55,4095 P20.1@6150.55,4046.85 6145.75,4042.05 6145.75,3677.64 6028.11,3560 5771.65,3560 S1.6@5728.43,3516.77
DIN8: C10.2 P3.14 P22.5 R47.1 | length 6493.3
  Top Layer w10: P3.14@3750,2870 3794.53,2825.47 3925,2825.47 3925.47,2825 3944.17,2825 4060.27,2708.9 4366.1,2708.9 4565,2510 5191.57,2510 5301.57,2620 5729.32,2620 5964.06,2385.27 5964.06,2025 5819,1879.94 5819,1802.35 5856.35,1765 ; C10.2@6405,2040 6330,2040 6325,2045 6235,2045 6120,1930 6120,1792.86 6092.14,1765 5856.35,1765 ; P22.5@6790,1925.55 6695.94,1831.5 6695.94,1679.06 6769.09,1605.91 6820.67,1605.91 6864.06,1562.52 6864.06,1072.88 6786.17,995 6295,995 6160.79,1129.21 6160.79,1460.56 5856.35,1765
E_STOP_FDBK: P3.7 R23.1 R24.2 | length 2590.2
  Top Layer w10: R23.1@1984.21,1581.57 R24.2@2085.79,1581.57 2085.79,1639.21 2050,1675 1965,1675 1940,1700 1940,1835 1920,1855 1822,1855 1786,1891 1786,2251 2140,2605 2140,2720.05 2165.42,2745.47 2925.47,2745.47 P3.7@3050,2870
Fan_Power: D16.1 K5.2 P20.6 | length 2427.4
  Top Layer w20: P20.6@5166.3,4095 5250,4095 5280.91,4125.91 5592.74,4125.91 5639.05,4079.6 5639.05,4014.11 5370,3745.05 5370,3385.36 5752.89,3002.46 D16.1@6117.87,3002.46 6065.68,2950.28 K5.2@5929,2950.28
GND: C1.1 C3.1 C8.1 C9.1 C10.1 C11.2 C12.2 D5.2 D7.2 D8.2 D9.2 D10.2 D11.2 D15.2 D17.1 K1.3 P2.2 P2.5 P3.4 P3.29 P4.2 P4.4 P5.2 P13.3 P13.4 P15.1 P15.2 P16.3 P17.1 P18.3 P18.4 P19.3 P21.2 P21.3 P21.5 P22.2 P23.2 P25.1 Q1.S Q2.S Q3.1 R6.1 R9.1 R13.1 R14.1 R21.1 R24.1 R26.1 R28.1 R29.2 R32.2 R34.1 R36.1 R39.1 R42.2 R43.2 R48.1 S2.4 S3.3 U1.2 U1.8 U2.1 U3.0 U3.2 U4.4 U5.4 U6.4 U7.4 | length 5580.4
  Top Layer w10: U7.4@2594.49,4185 2605,4195.51 v1(2605,4250) ; R29.2@4067.5,2579.07 R29.2@4070,2581.57
  Top Layer w30: v1(1315,2705) 1340,2680 Q1.S@1340,2675 ; R13.1@1450,2820 1465,2805 v1(1465,2750) ; R26.1@1745,1581.57 v1(1745,1660) D7.2@1745,1746.57 ; R24.1@2184.21,1581.57 v1(2184.21,1670) 2184.21,1745.78 D8.2@2185,1746.57 ; U5.4@2236.46,2678.43 2326.57,2678.43 2390,2615 2390,2534.29 2404.29,2520 2685,2520 R42.2@2735,2570 2810,2570 v1(2845,2605) ; v1(2275,3640) 2275,3730 R14.1@2275,3815 ; D9.2@2640,1741.57 2654.21,1727.36 R28.1@2654.21,1576.57 ; U1.2@2655,3640 2660,3635 2660,3575 v1(2865,3575) ; D5.2@3125,1730 v1(3125,1650) 3125,1579.22 R21.1@3139.21,1565 ; v1(3240,2630) 3276.57,2630 R43.2@3325,2678.43 ; R6.1@3476.57,4565 3476.57,4575.85 3730.72,4830 P2.2@3808.7,4830 ; D10.2@3649.21,1731.57 v1(3649.21,1650) 3653.42,1645.79 R34.1@3653.42,1580 ; U6.4@3925,2575 3928.43,2571.57 R29.2@4075,2571.57 ; D11.2@4110,1740 4113.43,1736.57 4113.43,1573.15 R36.1@4115,1571.57 ; R32.2@4171.57,1475 4171.57,1398.43 v1(4180,1390) ; C11.2@4375,2960 4375,2895 4480,2790 v1(4495,2790) 4495,2710 4550,2655 U4.4@4625,2655 ; R39.1@4553.43,1565 4553.43,1604.14 4609.21,1659.92 4609.21,1726.57 4610.78,1725 v1(4675,1725) ; C9.1@5361.57,4430 5361.57,4363.43 v1(5370,4355) ; C8.1@5740,4435 5740,4380 5819.25,4300.75 6003.04,4300.75 6050,4347.71 6050,4713.15 P19.3@5933.15,4830 ; Q3.1@6475,2695 6515,2655 D17.1@6515,2430 ; C10.1@6503.43,2040 6510,2046.57 R48.1@6510,2205
  Top Layer w40: U3.0@1263.5,3300 U3.0@1363.5,3300 ; U3.2@1263.5,4008.66 U3.2@1363.5,4008.66
  Bottom Layer w30: v1@2265,3640 v1(2275,3640)
  other v1: 4113.43,1655 2650,1660 6510,2130 4000,2565 1500,2585.2 2595,3845 3095,4330 2260,4399.96
HV_CHARGE_DISCHARGE_ENABLE: K3.4 P20.4 P20.5 R40.1 | length 15005.7
  Top Layer w10: K3.4@2677.98,2365 2536.36,2223.38 2536.36,1921.72 2548.08,1910 2745.36,1910 2812.36,1842.99 2812.36,1773.47 2825.08,1760.75 2825.08,1562.25 2868.83,1518.5 3193.5,1518.5 3210,1535 3210,1770 3225,1785 3289.37,1785 3305.08,1769.29 3305.08,1612.71 3320,1597.79 3320,1555.36 3355.28,1520.07 3491,1520.07 3500.93,1530 3579.63,1530 3664.63,1445 3769.85,1445 3824.85,1500 v1(3840,1500) ; R40.1@4565,1460 4555,1450 4555,1490.24 4635,1570.24 v1(4635,1615) 4670,1615 4835,1450 4922.22,1450 4972.02,1499.79 4972.02,1515.3 5030,1573.28 5030,1840.25 5066.37,1876.61 5103.65,1876.61 5115.26,1865 5728.07,1865 6140.79,1452.28 6140.79,1120.93 6286.72,975 6794.46,975 6884.06,1064.6 6884.06,1570.81 6828.96,1625.91 6777.38,1625.91 6715.94,1687.34 6715.94,1759.38 6759.33,1802.76 6832.24,1802.76 6890,1860.51 6890,1985 6850,2025 6745,2025 6695.94,2074.06 6695.94,2137.46 6943.1,2384.61 6943.1,2535 6943.1,4500.43 6943.1,4519.57 6940,4522.66 6940,4835 6810.94,4964.06 5390.01,4964.06 5335,4909.05 5335,4908.43 5326.57,4900 4960,4900 4920,4860 4920,4227.88 4817.8,4125.67 4817.8,4057.2 4902.2,3972.8 5240.95,3972.8 5363.15,4095 P20.4@5560,4095
  Bottom Layer w10: v1(3840,1500) 4048.43,1500 4163.43,1615 v1(4635,1615)
HV_EN_FDBK: P3.12 R38.1 R39.2 | length 3255.1
  Top Layer w10: P3.12@3550,2870 3558.74,2870 3643.74,2785 3927.6,2785 3999.06,2713.55 3999.06,2647.23 4036.29,2610 4107,2610 4155,2562 4155,1966.57 4120,1931.57 4120,1898.43 4160,1858.43 4160,1571.57 4155,1566.57 4155,1533.43 4156.72,1531.72 4085,1460 4085,1152.79 4142.79,1095 4412.35,1095 4470,1152.65 4470,1515 4463.5,1521.5 4403.5,1521.5 4365,1560 4370,1565 R39.2@4455,1565
HVD_FDBK: P3.9 R20.1 R21.2 | length 1945.9
  Top Layer w10: R20.1@2890.79,1565 R20.1@2894.72,1565 R21.2@3040.79,1565 3040.79,1673.79 3059.29,1692.29 3059.29,1767.71 3050.5,1776.5 2909.73,1776.5 ; 2909.72,1776.5 2886.35,1776.5 2832.36,1830.49 2832.36,1851.28 2754.65,1928.99 2754.65,2054.45 2755,2054.8 2755,2429.99 3150.48,2825.47 3205.47,2825.47 P3.9@3250,2870 P3.9@3226.5,2870
HVD_MCU: P3.22 P4.1 R7.1 | length 3965.4
  Top Layer w10: P4.1@1250,4283.15 1614.87,4283.15 1731.72,4400 1741.57,4400 1836.69,4495.12 2836.6,4495.12 2890,4441.72 2890,3948.28 2857.19,3915.47 2403.47,3915.47 2340.71,3852.71 2340.71,3777.29 2388,3730 2990,3730 P3.22@3250,3470 P3.22@3265,3485
HVD_STATUS: P3.25 P10.2 | length 1503.9
  Top Layer w10: P10.2@1840,2816.85 1810,2846.85 1810,2955 1925,3070 2550,3070 P3.25@2950,3470
I2C1_SCL: P3.1 R3.1 U2.4 U7.6 | length 4881.9
  Top Layer w10: P3.1@2442.8,2862.8 P3.1@2450,2870 2015,2870 1887.8,2742.8 1809.33,2742.8 1765.94,2786.18 1765.94,2975.94 1895,3105 1895,3468.28 1570,3793.28 1570,4180 1723.5,4333.5 1872.21,4333.5 1938.67,4399.96 U2.4@1960,4399.96 2039.96,4320 2244.2,4320 2335,4229.2 2335,4186.1 2362.91,4158.19 2384.29,4158.19 2407.48,4135 2384.29,4111.81 2362.91,4111.81 2340,4088.9 2340,4031.1 2435.63,3935.47 2848.9,3935.47 2870,3956.57 2870,4433.43 2828.31,4475.12 2690.12,4475.12 2640,4425 R3.1@2643.94,4425
I2C1_SDA: P3.2 R2.1 U2.3 U7.5 | length 3891.5
  Top Layer w10: R2.1@2356.06,4425 2356.06,4401.06 2310,4355 2310,4282.48 U7.5@2407.48,4185 ; R2.1@2360,4425 2329.88,4455.12 2231.15,4455.12 2210,4433.97 2210,4365.95 2188.85,4344.8 2115.16,4344.8 2049.96,4410 2033.97,4410 1988.85,4455.12 1931.15,4455.12 1900,4423.97 1900,4389.57 1863.93,4353.5 1713.5,4353.5 1550,4190 1550,3785 1875,3460 1875,3130.48 1745.94,3001.43 1745.94,2777.89 1801.04,2722.8 1896.08,2722.8 2023.28,2850 2389.73,2850 2414.26,2825.47 2485.74,2825.47 2505.47,2825.47 P3.2@2550,2870
IMD_STAT_FDBK: P3.11 R35.1 R36.2 | length 2996.7
  Top Layer w10: P3.11@3450,2870 3482.34,2870 3634.38,2717.95 3635.94,2717.95 3644.73,2709.17 3644.73,2707.61 3920,2433.89 3920,2325 3795,2200 3795,2046.36 3823.18,2018.18 3973.39,2018.18 4040,1951.57 4040,1898.43 4011.57,1870 3748.43,1870 3695,1816.57 3695,1488.43 3718.43,1465 3761.57,1465 3785,1488.43 3785,1521.57 3760,1546.57 3760,1767.12 3782.88,1790 3835,1790 3855,1770 3855,1620.79 3904.21,1571.57 3911.72,1571.57 3935.15,1595 3989.85,1595 4013.28,1571.57 R36.2@4016.57,1571.57